# Altium PCB Chronos.PcbDoc (part 2 of 6)
Units mm, origin at the board's own origin, x right, y up, seen from the top; angles counter-clockwise.
Board outline 74.94 x 59.01 mm, 8 copper layers (TOP, L02_GND, L03_SIG, L04_PWR, L05_GND, L06_SIG, L07_GND, BOTTOM), stack 1.624 mm thick; 413 components, 238 nets, 1566 pads, 873 vias.
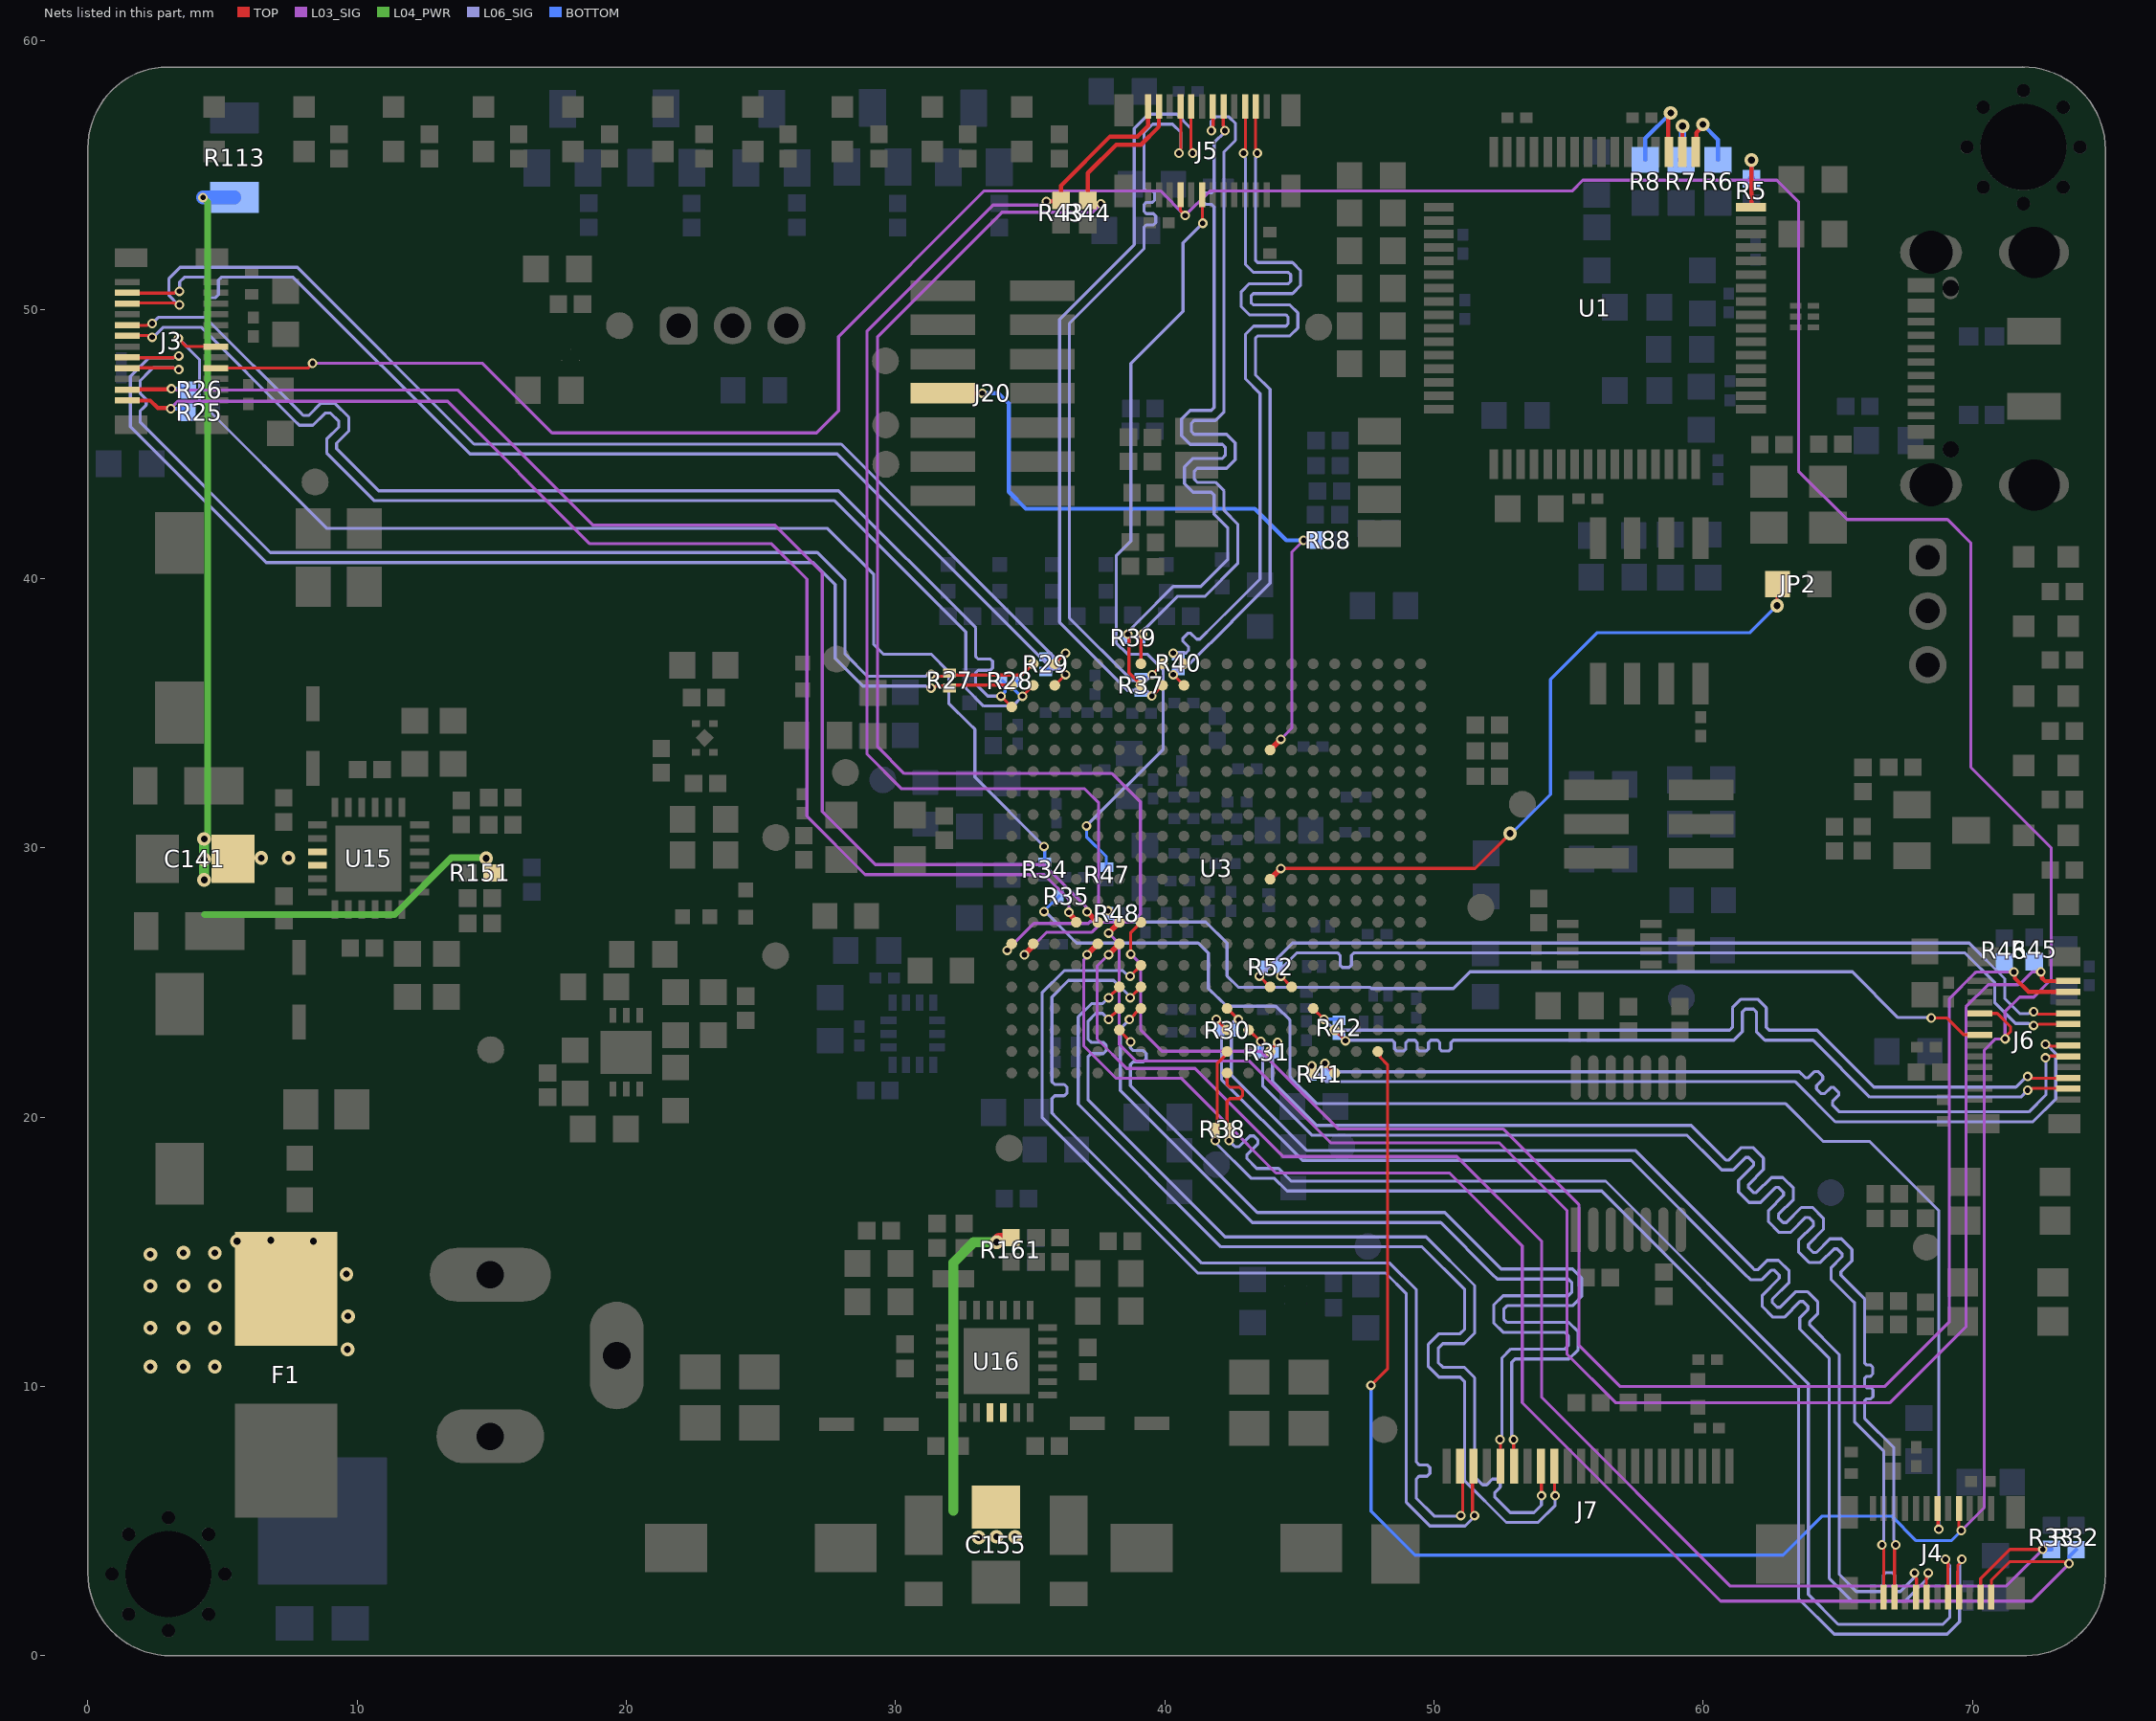
[diagram p8: the nets of this part, all layers, seen from the top]

## Part data
C1 C2 C3 C4 C7 C8 C9 C11 C12 C13 C15 C18 C19 C20 C24 C25 C27 C29 C31 C33 C35 C38 C40 C42 C45 C47 C49 C54 C55 C59 C60 C65 C66 C67 C68 C75 C92 C93 C95 C96 C99 C100 C102 C104 C106 C107 C171: library part 0u1_0402, "CAP CER 0.1UF 25V 10% X5R 0201", Manufacturer=Murata, Manufacturer Part Number=GRM033R61E104KE14J, Assy=-, Class=Discrete, Digikey P/N=399-3521-2-ND, PCB Footprint=C0201
  C1: Part Reference=C1
  C2: Part Reference=C2
  C3: Part Reference=C3
  C4: Part Reference=C4
  C7: Part Reference=C7
  C8: Part Reference=C8
  C9: Part Reference=C9
  C11: Part Reference=C11
  C12: Part Reference=C12
  C13: Part Reference=C13
  C15: Part Reference=C15
  C18 C38 C45 C102: Part Reference=C18
  C19 C40 C47 C104: Part Reference=C19
  C20: Part Reference=C20
  C24 C42 C49 C171: Part Reference=C24
  C25: Part Reference=C25
  C27: Part Reference=C27
  C29: Part Reference=C29
  C31: Part Reference=C31
  C33: Part Reference=C33
  C35: Part Reference=C35
  C54: Part Reference=C41
  C55: Part Reference=C42
  C59: Part Reference=C59
  C60: Part Reference=C60
  C65: Part Reference=C65
  C66: Part Reference=C66
  C67: Part Reference=C70
  C68: Part Reference=C71
  C75: Part Reference=C75
  C92 C99: Part Reference=C92
  C93 C100: Part Reference=C93
  C95: Part Reference=C95
  C96: Part Reference=C96
  C106: Part Reference=C106
  C107: Part Reference=C107
C5 C6 C10 C14: library part C, Current=CIMAX, MAX_TEMP=CTMAX, PSpiceTemplate="C^@REFDES %1 %2 ?TOLERANCE|C^@REFDES| @VALUE ?IC/IC=@IC/ ?TOLERANCE|\n.model C^@REFDES CAP C=1 DEV=@TOLERANCE%|", Voltage=CMAX, Assy=-, DIST=FLAT, KNEE=CBMAX, PCB Footprint=C0603, Populate=<Populate>, SLOPE=CSMAX
  C5: Part Reference=C5
  C6: Part Reference=C6
  C10: Part Reference=C10
  C14: Part Reference=C14
C16 C17: library part 0u1_0402, "CAP CER 18PF 25V 10% NP0 0402", Manufacturer=Kemet, Manufacturer Part Number=C0402C180K3GACTU, Assy=-, Class=Discrete, Digikey P/N=C0402C180K3GACTU-ND, PCB Footprint=C0402
  C16: Part Reference=C16
  C17: Part Reference=C17
C21 C22 C23 C37 C39 C41 C44 C46 C48 C52 C56 C57 C58 C64 C74 C91 C94 C98 C101 C103 C105 C108: library part 10uF_0603, "CAP CECAP CER 10UF 10V X5R 20% 0603", Manufacturer="Taiyo Yuden", Manufacturer Part Number=LMK107BJ106MALTD, Assy=-, Class=Discrete, Digikey P/N=587-2562-1-ND, PCB Footprint=C0603
  C21 C37 C44 C101: Part Reference=C21
  C22 C39 C46 C103: Part Reference=C22
  C23 C41 C48 C105: Part Reference=C23
  C52: Part Reference=C39
  C56: Part Reference=C68
  C57: Part Reference=C69
  C58: Part Reference=C58
  C64: Part Reference=C64
  C74: Part Reference=C74
  C91 C98: Part Reference=C91
  C94: Part Reference=C94
  C108: Part Reference=C108
C26 C28 C30 C32 C34 C36: library part 10uF_0603, "CAP CER 10UF 10V X5R 0402", Manufacturer=Samsung, Manufacturer Part Number=CL05A106MP8NUB8, Assy=-, Class=Discrete, Digikey P/N=587-2562-1-ND, PCB Footprint=C0402
  C26: Part Reference=C26
  C28: Part Reference=C28
  C30: Part Reference=C30
  C32: Part Reference=C32
  C34: Part Reference=C34
  C36: Part Reference=C36
C53: library part 0u1_0402, "CAP CECAP CER 10UF 10V X5R 20% 0603", Manufacturer="Taiyo Yuden", Manufacturer Part Number=LMK107BJ106MALTD, Assy=-, Class=Discrete, Digikey P/N=399-3521-2-ND, Part Reference=C40, PCB Footprint=C0603
C63 C76 C77: library part CAP_1, Assy=-, PCB Footprint=RLP-130-A
  C63: Part Reference=C63
  C76: Part Reference=C76
  C77: Part Reference=C77
C69 C71 C109 C110 C111 C112 C135 C136 C137 C138 C139 C140: library part "CAP NP", "CAP CER 10UF 10V 20% X6S 0603", Manufacturer=Samsung, Manufacturer Part Number=CL10X106MP8NRNC, Assy=-, Man. Part #=CL10X106MP8NRNC, MFG=Samsung, MFG P/N=CL10X106MP8NRNC, PCB Footprint=C0603
  C69 C71 C140: Part Reference=C140
  C109: Part Reference=C109
  C110: Part Reference=C110
  C111: Part Reference=C111
  C112: Part Reference=C112
  C135: Part Reference=C135
  C136: Part Reference=C136
  C137: Part Reference=C137
  C138: Part Reference=C138
  C139: Part Reference=C139
C70 C72 C118 C119 C120 C130 C131 C132: library part CAP_SMT_0805, "CAP CER 0.1UF 25V 10% X5R 0201", Manufacturer=Murata, Manufacturer Part Number=GRM033R61E104KE14J, Assy=-, PCB Footprint=C0201
  C70 C72 C120: Part Reference=C120
  C118: Part Reference=C118
  C119: Part Reference=C119
  C130: Part Reference=C130
  C131: Part Reference=C131
  C132: Part Reference=C132
C73 C97 C113 C114 C115 C116 C117 C124 C126 C127 C128 C129: library part CAP_1, "CAP CER 0.1UF 25V 10% X5R 0201", Manufacturer=Murata, Manufacturer Part Number=GRM033R61E104KE14J, Assy=-, PCB Footprint=C0201
  C73 C97 C113: Part Reference=C113
  C114: Part Reference=C114
  C115: Part Reference=C115
  C116: Part Reference=C116
  C117: Part Reference=C117
  C124: Part Reference=C124
  C126: Part Reference=C126
  C127: Part Reference=C127
  C128: Part Reference=C128
  C129: Part Reference=C129
C78: library part 0u1_0402, "CAP CER 0.1UF 25V 10% X5R 0402", Manufacturer=Murata, Manufacturer Part Number=GRM033R61E104KE14J, Assy=-, Class=Discrete, Digikey P/N=399-3521-2-ND, Part Reference=C78, PCB Footprint=C0201
C79 C80 C81 C121 C122 C123 C125 C133 C134: library part "CAP NP_Dup1", COMPFIXED=NO, COMPGROUP=0, COMPHEIGHT=0.000, COMPKEY=NO, COMPLOC=[1820.000,2015.000], COMPLOCKED=NO, COMPROT=270, COMPSIDE=TOP, DECOUPLER=NO, FPLIST=SM/C_0402, MEMORY=NO
  C79: Assy=DNI, Part Reference=C79, PCB Footprint=RLP-132, Populate=DNI
  C80: Assy=DNI, Part Reference=C80, PCB Footprint=RLP-132, Populate=DNI
  C81: Assy=DNI, Part Reference=C81, PCB Footprint=RLP-132, Populate=DNI
  C121: Assy=-, Part Reference=C121, PCB Footprint=C0603
  C122: Assy=-, Part Reference=C122, PCB Footprint=C0603
  C123: Assy=-, Part Reference=C123, PCB Footprint=C0603
  C125: Assy=-, Part Reference=C125, PCB Footprint=C0603
  C133: Assy=-, Part Reference=C133, PCB Footprint=C0603
  C134: Assy=-, Part Reference=C134, PCB Footprint=C0603
C141 C142 C143 C144 C145 C146 C147 C148 C149 C155 C156 C157 C158 C159 C160 C161 C162 C163 C164 C167: library part CAP-NP
  C141: Assy=-, Part Reference=C141, PCB Footprint=RLP-134
  C142: Assy=-, COMPFIXED=16V, Part Reference=C142, PCB Footprint=RLP-130-A
  C143: Assy=-, COMPFIXED=16V, Part Reference=C143, PCB Footprint=RLP-130-A
  C144: Assy=-, Part Reference=C144, PCB Footprint=RLP-130-A
  C145: Assy=-, Part Reference=C145, PCB Footprint=RLP-130-A
  C146: Assy=-, Part Reference=C146, PCB Footprint=RLP-130-A
  C147: Assy=-, Part Reference=C147, PCB Footprint=RLP-130-A
  C148: Assy=-, Part Reference=C148, PCB Footprint=RLP-130-A
  C149: Assy=-, Part Reference=C149, PCB Footprint=RLP-130-A
  C155: Assy=-, Part Reference=C155, PCB Footprint=RLP-134
  C156: Assy=-, COMPFIXED=16V, Part Reference=C156, PCB Footprint=RLP-130-A
  C157: Assy=-, COMPFIXED=16V, Part Reference=C157, PCB Footprint=RLP-130-A
  C158: Assy=-, Part Reference=C158, PCB Footprint=RLP-130-A
  C159: Assy=-, Part Reference=C159, PCB Footprint=RLP-130-A
  C160: Assy=-, Part Reference=C160, PCB Footprint=RLP-130-A
  C161: Assy=DNI, Part Reference=C161, PCB Footprint=RLP-130-A, Populate=DNI
  C162: Assy=DNI, Part Reference=C162, PCB Footprint=RLP-130-A, Populate=DNI
  C163: Assy=-, Part Reference=C163, PCB Footprint=RLP-130-A
  C164: Assy=-, Part Reference=C164, PCB Footprint=RLP-130-A
  C167: Assy=-, Part Reference=C167, PCB Footprint=RLP-130-A
C150 C151 C152 C153 C154 C165 C166 C168 C169 C170: library part CAP-NP, "CAP CER 22UF 10V X5R 0805", Manufacturer=Samsung, Manufacturer Part Number=CL21A226KPCLRNC, Assy=-, PCB Footprint=RLP-133
  C150: Part Reference=C150
  C151: Part Reference=C151
  C152: Part Reference=C152
  C153: Part Reference=C153
  C154: Part Reference=C154
  C165: Part Reference=C165
  C166: Part Reference=C166
  C168: Part Reference=C168
  C169: Part Reference=C169
  C170: Part Reference=C170
D1 D3 D4 D5 D6 D18 D19 D20 D21 D22 D23 D24 D25 D26 D27: library part LED-SMT1206_GREEN_1, Assy=-, PCB Footprint=APT1608
  D1: Part Reference=D1
  D3: Part Reference=D3
  D4: Part Reference=D4
  D5: Part Reference=D5
  D6: Part Reference=D6
  D18: Part Reference=D18
  D19: Part Reference=D19
  D20: Part Reference=D20
  D21: Part Reference=D21
  D22: Part Reference=D22
  D23: Part Reference=D23
  D24: Part Reference=D24
  D25: Part Reference=D25
  D26: Part Reference=D26
  D27: Part Reference=D27
D2: library part ESDR0502, "ESD Protection - SLP2510P8 package 8-PIN", ALS LIB=L0000, Assy=-, Class=IC, MFG=Semtech, MFG P/N=RClamp0524P, Part Reference=D2, PCB Footprint=UDFN6_040, Vendor=Digikey, Vendor P/N=RCLAMP0524PTR-ND
D17: library part LED-SMT1206_RED_0, Assy=-, Part Reference=D17, PCB Footprint=APT1608
D28: library part "DIODE SCHOTTKY21", Assy=-, Part Reference=D28, PCB Footprint=V12P10
D29 D30 D33 D34: library part DIODE_0, Assy=-, PCB Footprint=1N4448W
  D29: Part Reference=D29
  D30: Part Reference=D30
  D33: Part Reference=D33
  D34: Part Reference=D34
D31 D32 D35 D36: library part D-SCHOTTKY_0, Assy=-, PCB Footprint=DFLS220L
  D31: Part Reference=D31
  D32: Part Reference=D32
  D35: Part Reference=D35
  D36: Part Reference=D36
F1: library part SMTFUSE_0, "5A Fast-Blo SMT Socketed Fuse", Assy=-, Part Reference=F1, PCB Footprint=0154010
FB1 FB7 FB8: library part INDUCTOR_1, "FERRITE BEAD 120 OHM 0402 1LN", Manufacturer="TDK Corporation", Assy=-, Manufacturer Part Number=MPZ1005S121CT000, PCB Footprint=FB0402
  FB1: Part Reference=FB4
  FB7: Part Reference=FB7
  FB8: Part Reference=FB8
FB2 FB3 FB9 FB10: library part CMP-0686-00187-4, "Chip Ferrite Bead, 0402, 600Ω @ 100MHz, 0.52Ω, 25%, 300mA", Case Code (Imperial)=0402, Case Code (Metric)=1005, Current Rating=300mA, DC Resistance (DCR)=520mR, DC Resistance-Max=600mR, Frequency=100MHz, Max Operating Temperature=125°C, Min Operating Temperature=-55°C, Package Quantity=10000, Tolerance=25%, Case/Package=0402, Core Material=Ferrite, DC Current=300mA, Depth=0.55mm, Height=0.5mm, Impedance=600R, Lead Free="Lead Free", Length=1mm, Material=Steel, Max Current Rating=300mA, Max DC Current=300mA, Military Standard=Not, Number of Circuits=1, Number of Lines=1, Number of Pins=2, Packaging="Tape and Reel", Radiation Hardening=No, REACH SVHC="No SVHC", RoHS Compliant=Yes, Series=BLM15AG_SN, Shielding=Unshielded, Termination=SMD/SMT, Test Frequency=100MHz, Width=0.5mm
FB5 FB6: library part INDUCTOR_0, "FERRITE BEAD 120 OHM 0402 1LN", Manufacturer="TDK Corporation", Assy=-, Manufacturer Part Number=MPZ1005S121CT000, PCB Footprint=FB0402
  FB5: Part Reference=FB5
  FB6: Part Reference=FB6
IC1: "Integrated Circuit", Manufacturer_Name=TDK, Mouser Part Number=410-ICM-42688-P, Arrow Part Number=ICM-42688-P, Arrow Price/Stock=https://www.arrow.com/en/products/icm-42688-p/invensense?utm_currency=USD&region=nac, Datasheet Link=https://3cfeqx1hf82y3xcoull08ihx-wpengine.netdna-ssl.com/wp-content/uploads/2021/06/DS-000347-ICM-42688-P-v1.5.pdf, Manufacturer_Part_Number=ICM-42688-P, Mouser Price/Stock=https://www.mouser.co.uk/ProductDetail/TDK-InvenSense/ICM-42688-P?qs=OlC7AqGiEDk8QrNAV728zw%3D%3D
J1: library part CMP-1502-00936-4, "Conn, Pin Hdr, 6POS, 2ROW, 1.27MM Rohs Compliant: Yes"
J2: library part CMP-19038-000002-1, "CONN RCP USB2.0 TYP C 24P SMD RA"
J3 J4 J5 J6: "AXT524124 24 Position 0.4 mm Pitch Dual Row Board to Board Socket Narrow Pitch Connector", Ambient Temperature Range High=85°C, Contact Resistance=90mΩ, Current Rating=300mA, Insulation Resistance=1GΩ, Max Current Rating=5A, Max Voltage Rating (AC)=60V, Max Voltage Rating (DC)=6.06kV, Min Operating Temperature=-55°C, Connector Type=Socket, Contact Material="Gold, Nickel", Contact Plating=Gold, Depth=3mm, Gender=Receptacle, Height=1.17mm, Housing Material=Polymer, Lead Free="Lead Free", Length=7.3mm, Mated Stacking Heights=1mm, Max Operating Temperature=85°C, Mount="Surface Mount", NexarPartId=7879795, Number of Contacts=24, Number of Positions=24, Number of Rows=2, Orientation=Straight, Packaging="Cut Tape (CT)", Pitch=400µm, Radiation Hardening=No, RoHS=Compliant, Termination=Solder, Voltage Rating=60V
J7: "Connector", Manufacturer_Name=Hirose, Manufacturer_Part_Number=FH12-22S-0.5SH(1)(98), Mouser Part Number=798-FH1222S05SH198, Datasheet Link=https://www.hirose.com/en/product/document?clcode=CL0528-0014-1-98&productname=FH12-22S-0.5SH(1)(98)&series=FH12&documenttype=2DDrawing&lang=en&documentid=0001188303, Height=2.2mm, Mouser Price/Stock=https://www.mouser.co.uk/ProductDetail/Hirose-Connector/FH12-22S-0.5SH198?qs=tTj%252BmQ3KZwZO1A%252B5eseZow%3D%3D
J20: library part CMP-1502-00928-4, "Conn, Header, 14Pos, 2Row, 1.27Mm Rohs Compliant: Yes", Contact Resistance=20mΩ, Current Rating=1A, Operating Supply Voltage=100V, Gender=Male, Lead Pitch=1.27mm, Number of Pins=14, Orientation=Vertical, RoHS=Non-Compliant
J39: library part 22HP037A, "Male Power Jack 2.1mm", Assy=-, Part Reference=J39, PCB Footprint=pj_002a_3p
J44 P1: library part CMP-1502-00957-5, "THT Vertical Pin Header WR-PHD, Pitch 2.00 mm, Single Row, 3 pins", Contact Resistance=20mΩ, Current Rating=2A, Max Operating Temperature=105°C, Min Operating Temperature=-40°C, Operating Supply Voltage=200V, Contact Material=Gold, Gender=Male, Height=6.35mm, Lead Pitch=2mm, Number of Contacts=3, Number of Pins=3, Number of Rows=1, Orientation=Vertical, RoHS=Compliant, Voltage Rating=200V
JP1 JP2: library part JUMPER_0, Assy=-, PCB Footprint=Header_1x2
  JP1: Part Reference=JP1
  JP2: Part Reference=JP2
L1 L2 L3: library part FB0603, "FERRITE CHIP 600 OHM 500MA 0603", Manufacturer=Murata, Manufacturer Part Number=BLM18AG601SN1D, Assy=-, Class=Discrete, Digikey P/N=490-1014-1-ND, PCB Footprint=fb0603
  L1: Part Reference=L1
  L2: Part Reference=L2
  L3: Part Reference=L3
L4 L5 L6 L7 L8 L9: library part FB0603, "FERRITE BEAD 600 OHM 0402 1LN", Manufacturer=Murata, Manufacturer Part Number=BLM15AX601SN1D, Assy=-, Class=Discrete, Digikey P/N=490-1014-1-ND, PCB Footprint=FB0402
  L4: Part Reference=L4
  L5: Part Reference=L5
  L6: Part Reference=L6
  L7: Part Reference=L7
  L8: Part Reference=L8
  L9: Part Reference=L9
L14 L15 L16 L17: library part IND, Assy=-, COMPFIXED=SUMIDA, PCB Footprint=SPD62R
  L14: COMPGROUP=CDRH3D18, Part Reference=L14
  L15: COMPGROUP=CDRH3D18C, Part Reference=L15
  L16: COMPGROUP=CDRH3D18, Part Reference=L16
  L17: COMPGROUP=CDRH3D18C, Part Reference=L17
Q1 Q2 Q3 Q4 Q5 Q6: library part 2N2222, Assy=-, PCB Footprint=MMBT2222ALT-1
  Q1: Part Reference=Q1
  Q2: Part Reference=Q2
  Q3: Part Reference=Q3
  Q4: Part Reference=Q4
  Q5: Part Reference=Q5
  Q6: Part Reference=Q6
R1 R2 R3: library part 5k1_0402, "RES 4.70K OHM 1/10W 1% 0603 SMD", Manufacturer=Vishay, Manufacturer Part Number=CRCW06034K70FKEA, Assy=-, Class=Discrete, Digikey P/N=541-4.70KHTR-ND, PCB Footprint=R0603
  R1: Part Reference=R1
  R2: Part Reference=R2
  R3: Part Reference=R3
R4 R9: library part 5k1_0402, Manufacturer=Vishay, Manufacturer Part Number=CRCW06032K20FKEA, Assy=-, Class=Discrete, Digikey P/N=541-2.20KHTR-ND, PCB Footprint=R0603
  R4: Part Reference=R4
  R9: Part Reference=R9
R5: library part 0R_0603, "RES SMD 33 OHM 1% 1/10W 0402", Manufacturer=Panasonic, Manufacturer Part Number=ERJ-2RKF33R0X, Assy=-, Class=Discrete, Digikey P/N=311-0.0GRTR-ND, Part Reference=R5, PCB Footprint=R0402
R6 R7 R8 R20 R21 R22 R145 R146 R147 R149 R150: library part 0R_0603, "RES 0.0 OHM 1/10W JUMP 0603 SMD", Manufacturer=Yageo, Manufacturer Part Number=RC0603JR-070RL, Class=Discrete, Digikey P/N=311-0.0GRTR-ND, PCB Footprint=R0603
  R6: Assy=-, Part Reference=R6
  R7: Assy=-, Part Reference=R7
  R8: Assy=-, Part Reference=R8
  R20: Assy=-, Part Reference=R20
  R21: Assy=-, Part Reference=R21
  R22: Assy=-, Part Reference=R22
  R145: Assy=DNI, Part Reference=R145
  R146: Assy=DNI, Part Reference=R146
  R147: Assy=DNI, Part Reference=R147
  R149: Assy=DNI, Part Reference=R149
  R150: Assy=DNI, Part Reference=R150
R10 R11 R12 R57: library part RES_10K_1W16_0402_5P, "RES 10K OHM 1/10W 5% 0603", Manufacturer="Stackpole Electronics Inc", Manufacturer Part Number=RMCF0603JT10K0, MAX_TEMP=RTMAX, Assy=-, Digikey P/N=RMCF0603JT10K0TR-ND, DIST=FLAT, Length(mm)=1, MFG="Stackpole Electronics Inc", MFG P/N=RMCF0402JT10K0, PCB Footprint=R0603, TC1=0, TC2=0, Total Area(sq-mm)=0.5, Unit Price (USD)=0.02, Wattage=1/10W, Width(mm)=0.5
  R10 R57: Part Reference=R10
  R11: Part Reference=R11
  R12: Part Reference=R12
R13 R16: library part 10k_0402, "RES 12K OHM 1/10W 1% 0603 SMD", Manufacturer=Yageo, Manufacturer Part Number=RC0603FR-0712KL, Tolerance=1%, Assy=-, Class=Discrete, Digikey P/N=311-12.0KHRTR-ND, PCB Footprint=R0603
  R13: Part Reference=R13
  R16: Part Reference=R16
R14 R113: library part RES_0, Assy=-
  R14: Part Reference=R14, PCB Footprint=RLP-101
  R113: Part Reference=R113, PCB Footprint=RLP-103
R15 R17: library part 0R_0603, "Res 1/10W 0.0 Ohm 5% 0603", Manufacturer=Yageo, Manufacturer Part Number=RC0603JR-070RL, Assy=DNI, Class=Discrete, Digikey P/N=311-0.0GRTR-ND, PCB Footprint=R0603
  R15: Part Reference=R15
  R17: Part Reference=R17
R18 R19 R53 R54: library part RESISTOR, Assy=-, PCB Footprint=RLP-101, Populate=<Populate>
  R18 R53: Part Reference=R18
  R19 R54: Part Reference=R19
R23 R75: library part RES_100K_1W16_0402_5P, "RES 100K OHM 1/10W 1% 0402 SMD", Manufacturer=Panasonic, Manufacturer Part Number=ERJ-2RKF1003X, MAX_TEMP=RTMAX, Assy=-, DIST=FLAT, Length(mm)=1, MFG=Panasonic, MFG P/N=ERJ-2RKF1003X, PART_NUMBER=ERJ-2RKF1003X, PCB Footprint=R0402, TC1=0, TC2=0, Total Area(sq-mm)=0.5, Unit Price (USD)=0.02, Wattage=1/16W, Width(mm)=0.5
  R23: Part Reference=R23
  R75: Part Reference=R75
R24: library part 0R_0603, "RES SMD 22 OHM 1% 1/10W 0402", Manufacturer=Panasonic, Manufacturer Part Number=ERJ-2RKF22R0X, Assy=-, Class=Discrete, Digikey P/N=311-0.0GRTR-ND, MFG=Panasonic, MFG P/N=ERJ-2RKF22R0X, Part Reference=R24, PCB Footprint=R0402
R25 R26 R32 R33 R36 R43 R44 R45 R46 R51: library part 5k1_0402, "RES SMD 2.2K OHM 1% 1/10W 0402", Manufacturer=Panasonic, Manufacturer Part Number=ERJ-2RKF2201X, Assy=-, BOM NOTE=-, Class=Discrete, Digikey P/N=311-5.10KLRTR-ND, PCB Footprint=R0402
  R25 R32 R43 R45: Part Reference=R25
  R26 R33 R36 R44 R46 R51: Part Reference=R26
R27 R28 R29 R30 R31 R37 R38 R39 R40 R41 R42 R52: library part RES_100K_1W16_0402_5P, "RES SMD 100 OHM 1% 1/20W 0201", Manufacturer=Yageo, Manufacturer Part Number=RC0201FR-07100RL, MAX_TEMP=RTMAX, Assy=DNI, DIST=FLAT, Length(mm)=1, MFG=Yageo, MFG P/N=RC0201FR-07100RL, PCB Footprint=R0201, TC1=0, TC2=0, Total Area(sq-mm)=0.5, Unit Price (USD)=0.02, Wattage=1/16W, Width(mm)=0.5
  R27 R37 R38 R52: Part Reference=R27
  R28 R39: Part Reference=R28
  R29 R40: Part Reference=R29
  R30 R41: Part Reference=R30
  R31 R42: Part Reference=R31
R34 R35 R47 R48: library part 0R_0603, "RES SMD 33 OHM 1% 1/10W", Manufacturer=Panasonic, Manufacturer Part Number=ERJ-2RKF33R0X, Assy=-, Class=Discrete, Digikey P/N=311-0.0GRTR-ND, Part Reference=R5, PCB Footprint=R0402
R55 R56: library part CMP-2002-05251-2, "Thick Film Chip Resistors 0402 5.1kΩ 0.0625W 1% 100ppm/°C", Case Code (Metric)=1005, Case Code (Imperial)=0402, Max Operating Temperature=125°C, Max Power Dissipation=63mW, Min Operating Temperature=-55°C, Package Quantity=10000, Power Rating=62.5mW, Resistance=5.1kR, Temperature Coefficient=100ppm/°C, Tolerance=1%, Voltage Rating=50V, Case/Package=0402, Composition="Thick Film", Contact Plating=Tin, Depth=0.5mm, Height=0.016inch, Length=1mm, Military Standard=Not, Mount="Surface Mount", Number of Terminations=2, Packaging="Tape and Reel", Radiation Hardening=No, Termination=SMD/SMT, Thickness=356um, Width=0.02inch
R58 R59 R60 R61 R62 R63: library part RES_100K_1W16_0402_5P, "RES SMD 33 OHM 1% 1/20W 0201", Manufacturer=Yageo, MAX_TEMP=RTMAX, Assy=DNI, DIST=FLAT, Length(mm)=1, MFG=Yageo, Part Reference=R27, PCB Footprint=R0201, TC1=0, TC2=0, Total Area(sq-mm)=0.5, Unit Price (USD)=0.02, Wattage=1/16W, Width(mm)=0.5
R64 R65 R66 R67 R68 R70 R88 R89 R90 R91 R92: library part R_Dup2, "RES SMD 0.0OHM JUMPER 1/10W 0402", Manufacturer=Panasonic, Manufacturer Part Number=ERJ-2GE0R00X, MAX_TEMP=RTMAX, POWER=RMAX, PSpiceTemplate="R^@REFDES %1 %2 ?TOLERANCE|R^@REFDES| @VALUE  ?TOLERANCE|\n.model R^@REFDES RES R=1 DEV=@TOLERANCE%|", Voltage=RVMAX, Assy=-, COMPFIXED=NO, COMPGROUP=0, COMPHEIGHT=0.000, COMPKEY=NO, COMPLOC=[3325.000,1400.000], COMPLOCKED=NO, COMPROT=180, COMPSIDE=TOP, DECOUPLER=NO, DIST=FLAT, FPLIST=AX/RC05, MEMORY=NO, PCB Footprint=R0402, SLOPE=RSMAX
  R64 R65 R66 R67 R68 R70 R88: Part Reference=R88
  R89: Part Reference=R89
  R90: Part Reference=R90
  R91: Part Reference=R91
  R92: Part Reference=R92
R69 R83: library part RES_0, "RES SMD 10K OHM 1% 1/16W 0402", Manufacturer=Yageo, Manufacturer Part Number=RC0402FR-0710KL, Assy=-, MFG=Yageo, MFG P/N=RC0402FR-0710KL, PCB Footprint=R0402
  R69: Part Reference=R69
  R83: Part Reference=R83
R72 R80: library part 0R_0603, "RES SMD 100 OHM 1% 1/16W 0402", Manufacturer=Yageo, Manufacturer Part Number=RC0402FR-07100RL, Assy=-, Class=Discrete, Digikey P/N=311-0.0GRTR-ND, MFG=Yageo, PCB Footprint=R0402
  R72: Part Reference=R72
  R80: MFG P/N=RC0402FR-07100RL, Part Reference=R80
R73 R74 R78: library part R_Dup3, "RES SMD 33 OHM 1% 1/10W 0402", Manufacturer=Panasonic, Manufacturer Part Number=ERJ-2RKF33R0X, Assy=-, PCB Footprint=R0402
  R73: Part Reference=R73
  R74: Part Reference=R74
  R78: Part Reference=R78
R76 R82: library part R_Dup3, "RES SMD 10K OHM 1% 1/16W 0402", Manufacturer=Yageo, Manufacturer Part Number=RC0402FR-0710KL, Assy=-, MFG=Yageo, MFG P/N=RC0402FR-0710KL, PCB Footprint=R0402
  R76: Part Reference=R76
  R82: Part Reference=R82
R77: library part R_Dup3, "RES SMD 100 OHM 1% 1/16W 0402", Manufacturer=Yageo, Manufacturer Part Number=RC0402FR-07100RL, Assy=-, MFG=Yageo, MFG P/N=RC0402FR-07100RL, Part Reference=R77, PCB Footprint=R0402
R79 R81 R115 R117 R118 R119 R125 R126: library part RES_0, "RES SMD 1K OHM 1% 1/10W 0402", Manufacturer=Panasonic, Manufacturer Part Number=ERJ-2RKF1001X, Assy=-, PCB Footprint=R0402
  R79: Part Reference=R79
  R81: Part Reference=R81
  R115: Part Reference=R115
  R117: Part Reference=R117
  R118: Part Reference=R118
  R119: Part Reference=R119
  R125: Part Reference=R125
  R126: Part Reference=R126
R84 R85 R87 R140 R142: library part R_Dup2, "RES SMD 4.7K OHM 5% 1/10W 0402", Manufacturer=Panasonic, Manufacturer Part Number=ERJ-2GEJ472X, MAX_TEMP=RTMAX, POWER=RMAX, PSpiceTemplate="R^@REFDES %1 %2 ?TOLERANCE|R^@REFDES| @VALUE  ?TOLERANCE|\n.model R^@REFDES RES R=1 DEV=@TOLERANCE%|", Voltage=RVMAX, Assy=-, COMPFIXED=NO, COMPGROUP=0, COMPHEIGHT=0.000, COMPKEY=NO, COMPLOC=[970.000,1160.000], COMPLOCKED=NO, COMPROT=180, COMPSIDE=TOP, DECOUPLER=NO, DIST=FLAT, FPLIST=AX/RC05,SM/R_0603, MEMORY=NO, MFG=Panasonic, MFG P/N=ERJ-2GEJ472X, PCB Footprint=R0402, SLOPE=RSMAX
  R84: Part Reference=R84
  R85: Part Reference=R85
  R87: Part Reference=R87
  R140: Part Reference=R140
  R142: Part Reference=R142
R86: library part R_Dup2, "RES SMD 1K OHM 1% 1/10W 0402", Manufacturer=Panasonic, Manufacturer Part Number=ERJ-2RKF1001X, MAX_TEMP=RTMAX, POWER=RMAX, PSpiceTemplate="R^@REFDES %1 %2 ?TOLERANCE|R^@REFDES| @VALUE  ?TOLERANCE|\n.model R^@REFDES RES R=1 DEV=@TOLERANCE%|", Voltage=RVMAX, Assy=DNI, COMPFIXED=NO, COMPGROUP=0, COMPHEIGHT=0.000, COMPKEY=NO, COMPLOC=[970.000,1160.000], COMPLOCKED=NO, COMPROT=180, COMPSIDE=TOP, DECOUPLER=NO, DIST=FLAT, FPLIST=AX/RC05,SM/R_0603, MEMORY=NO, Part Reference=R86, PCB Footprint=R0402, SLOPE=RSMAX
R114: library part RES_0, "RES SMD 2.2K OHM 1% 1/10W 0402", Manufacturer=Panasonic, Manufacturer Part Number=ERJ-2RKF2201X, Assy=-, Part Reference=R114, PCB Footprint=R0402
R116 R120 R141 R144: library part RES_1K_1W16_0402_5P, "RES SMD 1K OHM 1% 1/10W 0402", Manufacturer=Panasonic, Manufacturer Part Number=ERJ-2RKF1001X, MAX_TEMP=RTMAX, Assy=-, DIST=FLAT, Length(mm)=1, MFG="Stackpole Electronics Inc", MFG P/N=RMCF0402JT1K00, PCB Footprint=R0402, TC1=0, TC2=0, Total Area(sq-mm)=0.5, Unit Price (USD)=0.02, Wattage=1/16W, Width(mm)=0.5
  R116: Part Reference=R116, Reference=R116
  R120: Part Reference=R120, Reference=R120
  R141: Part Reference=R141, Reference=R141
  R144: Part Reference=R144, Reference=R144
R121: library part RES_0, "RES SMD 750 OHM 5% 1/10W 0402", Manufacturer=Panasonic, Manufacturer Part Number=ERJ-2GEJ751X, Assy=-, Part Reference=R121, PCB Footprint=R0402
R122 R123 R124 R132 R133: library part RES_0, "RES SMD 4.7K OHM 5% 1/10W 0402", Manufacturer=Panasonic, Manufacturer Part Number=ERJ-2GEJ472X, Assy=-, MFG=Panasonic, MFG P/N=ERJ-2GEJ472X, PCB Footprint=R0402
  R122: Part Reference=R122
  R123: Part Reference=R123
  R124: Part Reference=R124
  R132: Part Reference=R132
  R133: Part Reference=R133
R127 R128 R129 R130 R131 R134 R135 R136 R137 R138 R153: library part R_Dup2, MAX_TEMP=RTMAX, POWER=RMAX, PSpiceTemplate="R^@REFDES %1 %2 ?TOLERANCE|R^@REFDES| @VALUE  ?TOLERANCE|\n.model R^@REFDES RES R=1 DEV=@TOLERANCE%|", Voltage=RVMAX, Assy=-, COMPFIXED=NO, COMPGROUP=0, COMPHEIGHT=0.000, COMPKEY=NO, COMPLOC=[970.000,1160.000], COMPLOCKED=NO, COMPROT=180, COMPSIDE=TOP, DECOUPLER=NO, DIST=FLAT, FPLIST=AX/RC05,SM/R_0603, MEMORY=NO, PCB Footprint=0603, SLOPE=RSMAX, Tollerance=1%
  R127: Part Reference=R127
  R128: Part Reference=R128
  R129: Part Reference=R129
  R130: Part Reference=R130
  R131: Part Reference=R131
  R134: Part Reference=R134
  R135: Part Reference=R135
  R136: Part Reference=R136
  R137: Part Reference=R137
  R138: Part Reference=R138
  R153: Part Reference=R153
R143 R148 R151 R154 R155 R156 R157 R158 R159 R160 R161 R164 R165 R166 R167 R168 R169 R170: library part R_Dup1, Assy=-
  R143: COMPFIXED=1%, Part Reference=R143, PCB Footprint=RLP-101
  R148: COMPFIXED=1%, Part Reference=R148, PCB Footprint=RLP-101
  R151: Part Reference=R151, PCB Footprint=RLP-100
  R154: COMPFIXED=1%, Part Reference=R154, PCB Footprint=RLP-101
  R155: COMPFIXED=1%, Part Reference=R155, PCB Footprint=RLP-101
  R156: COMPFIXED=1%, Part Reference=R156, PCB Footprint=RLP-101
  R157: COMPFIXED=1%, Part Reference=R157, PCB Footprint=RLP-100
  R158: COMPFIXED=1%, COMPGROUP="Freq = 1.0 MHz", Part Reference=R158, PCB Footprint=RLP-100
  R159: COMPFIXED=1%, Part Reference=R159, PCB Footprint=RLP-100
  R160: COMPFIXED=1%, Part Reference=R160, PCB Footprint=RLP-101
  R161: Part Reference=R161, PCB Footprint=RLP-100
  R164: COMPFIXED=1%, Part Reference=R164, PCB Footprint=RLP-101
  R165: COMPFIXED=1%, Part Reference=R165, PCB Footprint=RLP-101
  R166: COMPFIXED=1%, Part Reference=R166, PCB Footprint=RLP-100
  R167: COMPFIXED=1%, COMPGROUP="Freq = 625 KHz", Part Reference=R167, PCB Footprint=RLP-100
  R168: COMPFIXED=1%, Part Reference=R168, PCB Footprint=RLP-100
  R169: COMPFIXED=1%, Part Reference=R169, PCB Footprint=RLP-101
  R170: COMPFIXED=1%, Part Reference=R170, PCB Footprint=RLP-101
R172: library part 5k1_0402, "RES SMD 10K OHM 1% 1/10W 0603", Manufacturer=Yageo, Manufacturer Part Number=RC0603FR-0710KL, Assy=-, Class=Discrete, Digikey P/N=541-4.70KHTR-ND, Part Reference=R172, PCB Footprint=R0603
R173: library part 0R_0603, "RES SMD 1K OHM 1% 1/10W 0603", Manufacturer=Yageo, Manufacturer Part Number=RC0603FR-071KL, Assy=DNI, Class=Discrete, Digikey P/N=311-0.0GRTR-ND, Part Reference=R173, PCB Footprint=R0603
R174 R175 R176 R177: library part RES_0, "RES SMD 2K OHM 5% 1/10W 0402", Manufacturer=Panasonic, Manufacturer Part Number=ERJ-2GEJ202X, Assy=-, MFG=Panasonic, MFG P/N=ERJ-2GEJ202X, PCB Footprint=R0402
  R174: Part Reference=R174
  R175: Part Reference=R175
  R176: Part Reference=R176
  R177: Part Reference=R177
SW4 SW5: library part "SW PUSHBUTTON-SPST/SM", "SWITCH TACTILE SPST-NO 0.05A 12V", Manufacturer=Wurth, Manufacturer Part Number=434153017835, Assy=-, Man. Part #=434153017835, MFG=Wurth, MFG P/N=434153017835, PCB Footprint=4psmd_switch
  SW4: Part Reference=SW4
  SW5: Part Reference=SW5
TP1 TP2 TP_V1P0_LDO TP_V1P2 TP_V1P8 TP_V1P8_LDO TP_V2P8 TP_V3P3 TP_V5P0 TP_VCC_CORE_V1P0 TP_VCCIO0 TP_VCCIO1 TP_VCCIO2 TP_VCCIO3 TP_VCCIO4 TP_VCCIO5 TP_VCCIO6 TP_VCCIO7: "Square test point, 40mil inner diameter, 63mil outer diameter", Assy=DNI, Class=IO
  TP1: Part Reference=TP1, PCB Footprint=TP
  TP2: Part Reference=TP2, PCB Footprint=TP
  TP_V1P0_LDO: Part Reference=TP_V1P0_LDO, PCB Footprint=tp_s_40_63
  TP_V1P2: Part Reference=TP_V1P2, PCB Footprint=tp_s_40_63
  TP_V1P8: Part Reference=TP_V1P8, PCB Footprint=tp_s_40_63
  TP_V1P8_LDO: Part Reference=TP_V1P8_LDO, PCB Footprint=tp_s_40_63
  TP_V2P8: Part Reference=TP_V2P8, PCB Footprint=tp_s_40_63
  TP_V3P3: Part Reference=TP_V3P3, PCB Footprint=tp_s_40_63
  TP_V5P0: Part Reference=TP_V5P0, PCB Footprint=tp_s_40_63
  TP_VCC_CORE_V1P0: Part Reference=TP_VCC_CORE_V1P0, PCB Footprint=tp_s_40_63
  TP_VCCIO0: Part Reference=TP_VCCIO0, PCB Footprint=tp_s_40_63
  TP_VCCIO1: Part Reference=TP_VCCIO1, PCB Footprint=tp_s_40_63
  TP_VCCIO2: Part Reference=TP_VCCIO2, PCB Footprint=tp_s_40_63
  TP_VCCIO3: Part Reference=TP_VCCIO3, PCB Footprint=tp_s_40_63
  TP_VCCIO4: Part Reference=TP_VCCIO4, PCB Footprint=tp_s_40_63
  TP_VCCIO5: Part Reference=TP_VCCIO5, PCB Footprint=tp_s_40_63
  TP_VCCIO6: Part Reference=TP_VCCIO6, PCB Footprint=tp_s_40_63
  TP_VCCIO7: Part Reference=TP_VCCIO7, PCB Footprint=tp_s_40_63
TP7 TP9 TP10 TP12: library part "T POINT R", Assy=-, PCB Footprint=TP50
  TP7: Part Reference=TP7
  TP9: Part Reference=TP9
  TP10: Part Reference=TP10
  TP12: Part Reference=TP12
U1: "IC USB HS DUAL UART/FIFO 64-LQFP", Manufacturer=FTDI, Assy="Customer Supplied", Class=IC, Digikey P/N=768-1024-1-ND, Manufacturer Part Number=FT2232HL, Part Reference=U1, PCB Footprint=tqfp64_0p5_12p2x12p2_h1p6
U2: library part 93LC56_SO8_0, "IC EEPROM 2KBIT 3MHZ 8SOIC", Manufacturer=Microchip, Assy=-, Class=IC, Digikey P/N=93LC56C-I/SN-ND, Manufacturer Part Number=93LC56C-I/SN, Part Reference=U2, PCB Footprint=so8_50_244
U3: Color=Default, Power Pins Visible=False, Assy=-, Graphic=LIFCL-40-BG400A.Normal, Implementation Type=<none>, Location X-Coordinate=0, Location Y-Coordinate=0, Name=I17266603, Part Reference=U3, PCB Footprint=LIFCL-40-BG400, Primitive=DEFAULT, Source Library=C:\USERS\SLIU1\DOCUMENTS\PCB_DESIGN\JEDI_EVAL_BOARD\SCHEMATIC\LIFCL40.OLB, Source Package=LIFCL-40-BG400, Source Part=LIFCL-40-BG400A.Normal, SPLIT_INST=TRUE, SWAP_INFO=(S1+S2+S3+S4+S5+S6+S7+S8+S9+S10+S11+S12+S13+S14+S15)
U5: library part CMP-0440-00179-4, "IC BUF NON-INVERT 3.6V 14TSSOP", Case/Package=TSSOP, High Level Output Current=-24mA, Low Level Output Current=24mA, Max Operating Temperature=125°C, Max Power Dissipation=500mW, Max Supply Voltage=3.6V, Min Operating Temperature=-40°C, Min Supply Voltage=1.65V, Package Quantity=1, Quiescent Current=1uA, Contact Plating=Gold, Height=1.15mm, Lead Free="Lead Free", Length=5mm, Logic Function=Buffer, Mount="Surface Mount", Number of Bits=4, Number of Bits per Element=1, Number of Channels=4, Number of Circuits=4, Number of Elements=4, Number of Gates=4, Number of Input Lines=4, Number of Inputs=4, Number of Output Lines=3, Number Of Outputs=4, Number of Pins=14, Packaging="Tape and Reel", Polarity=Non-Inverting, Propagation Delay=4.6ns, Radiation Hardening=No, REACH SVHC="No SVHC", Termination=SMD/SMT, Turn-On Delay Time=5.3ns, Width=4.4mm
U6: library part N25QxxxA13xF8_0, "IC FLASH 128MBIT 104MHZ 8SOP", Manufacturer=Macronix, Assy=-, Manufacturer Part Number=MX25L12833FM2I-10G, Part Reference=U6, PCB Footprint=SO8_MX25L12833FM2I10G, Populate=DI
U9: library part CMP-0859-00680-4, "IC BUFFER NON-INVERT 5.5V US8", Ambient Temperature Range High=+125°C, Ambient Temperature Range Low=-40°C, Manufacturer="Texas Instruments", Max Junction Temp=+150°C, Max Supply Voltage=5.5V, Min Supply Voltage=1.65V, Package=DCU0008A, Temperature="-40°C to +125°C", Automotive=No, Category=IC, ComponentLink2Description=Datasheet, ComponentLink2URL=http://www.ti.com/lit/ds/symlink/sn74lvc2g125.pdf, Device Class L1="Integrated Circuits (ICs)", Device Class L2="Logic ICs", Device Class L3=Buffers, Digikey Description="IC BUFFER NON-INVERT 5.5V US8", Height=0.9mm, Ipc Land Pattern Name=SOP50P310X75-8, Lead Free=Yes, Logic Function Desc=Non-Inverting, Manufacturer Part Number=SN74LVC2G125DCUR, Mouser Description="Buffers & Line Drivers Tri-State Dual Bus", Number of Circuits=2, Number of Inputs=1, Number Of Outputs=1, Octopart=https://octopart.com/sn74lvc2g125dcur-texas+instruments-464564, Propagation Delay=4.2ns, RoHS=TRUE, Standoff Height=0mm, Temperature Range High=+125°C, Temperature Range Low=-40°C
U15 U16: library part LT3508EUF-QFN24UF-4X4_0, Assy=-, DES="IC, LINEAR TECH, LTC1563", PCB Footprint=LT3508EUF, UCOST=$0.00
  U15: Part Reference=U15
  U16: Part Reference=U16
X1: library part crystal-3p2x2p5, "CRYSTAL 12MHZ 18PF SMD", Manufacturer=TXC, Manufacturer Part Number=7M-12.000MAAJ-T, Assy=-, Class=IC, Digikey P/N=887-1121-2-ND, Part Reference=X1, PCB Footprint=xtal_4p_7m
X2: library part OSC_25MHz_10PPM, "Standard Clock Oscillators 27.000M 1.8V 30ppm", Manufacturer=ABRACON, Assy=-, Length(mm=5.1, Manufacturer Part Number=ASE3-27.000MHz-K-T, MFG="Abracon Corporation", MFG P/N=ASFLMB-25.000MHZ-LY-T, Part Reference=X2, PCB Footprint=27MHZ, Total Area(sq-mm)=16.83, Unit Price (USD)=1.96, Width(mm)=3.3
U11: Assy=-, Part Reference=U11, PCB Footprint=4XDFN_NCP110
U12: Assy=-, Part Reference=U12, PCB Footprint=4XDFN_NCP110
U13: Assy=-, Part Reference=U13, PCB Footprint=6HVSOF_BD00IC0WHFV
U14: Assy=-, Part Reference=U14, PCB Footprint=4X2SON

## Free pads (board coordinates)
  round 0.5 hole 0.5: 1(0.893,3.03) 1(1.508,1.545) 1(1.508,4.515) 1(2.993,0.93) 1(2.993,5.13) 1(4.478,1.545) 1(4.478,4.515) 1(5.093,3.03) 1(69.797,56.03) 1(70.412,54.545) 1(70.412,57.515) 1(71.897,53.93) 1(71.897,58.13) 1(73.382,54.545) 1(73.382,57.515) 1(73.997,56.03)
  round 3.2 hole 3.2: 1(2.993,3.03) 1(71.897,56.03)

## Via types
v1: diameter 0.356, hole 0.203, TOP to BOTTOM, tented both sides, 492 vias
v2: diameter 0.508, hole 0.254, TOP to BOTTOM, tented both sides, 380 vias
v3: diameter 0.356, hole 0.203, TOP to BOTTOM, 1 vias

## Nets (pads, with @x,y where several pads share a name; then routed paths per layer and width w, separated by ;. In a path a pad name is that pad's centre, name@x,y a point inside that pad or via, vN(x,y) a via of type N, cw(c..) or ccw(c..) an arc to the next point about the centre after c; other vN are vias at no path point)
12MHZ: JP2.2 U3.L13 | length 26.6
  TOP w0.114: v1(44.315,29.24) 51.532,29.24 v2(52.832,30.539) 52.805,30.539 v2@52.745,30.6 ; v2(62.745,39) 62.745,39.775 JP2.2@62.77,39.8
  TOP w0.203: U3.L13@43.915,28.84 v1(44.315,29.24)
  BOTTOM w0.114: v2@52.774,30.429 54.332,31.987 54.332,36.259 56.073,38 61.745,38 v2(62.745,39)
+12.0V: C141.1 C155.1 F1.2 R113.2 R151.1 R161.1 U15.9 U15.10 U16.9 U16.10 | length 50.4
  TOP w0.254: v2(14.793,29.618) 14.841,29.569 14.841,29.246 R151.1@15.011,29.077
  TOP w0.508: v2(33.758,15.359) 33.855,15.457 34.216,15.457 R161.1@34.287,15.528
  L04_PWR w0.254: v1(4.276,54.162) 4.448,53.99 4.448,30.47 v2(4.316,30.338) ; 4.316,27.531 11.392,27.531 13.502,29.641 14.77,29.641 v2(14.793,29.618)
  L04_PWR w0.381: v2(4.316,28.814) v2(4.316,29.576) v2(4.316,30.338) ; 32.145,5.4 32.145,14.6 32.904,15.359 v2(33.758,15.359)
  BOTTOM w0.508: v1(4.276,54.162) R113.2@5.442,54.162
  other v2: 33.092,4.394 33.752,4.42 34.438,4.42 2.319,10.736 3.544,10.736 4.713,10.736 9.643,11.379 2.319,12.175 3.544,12.175 4.713,12.175 9.66,12.611 2.319,13.737 3.544,13.737 4.713,13.737 9.598,14.174 2.319,14.905 4.713,14.963 3.544,14.966 5.541,15.395 8.37,15.395 6.798,15.429 6.437,29.629 7.453,29.629
ADBUS0: R5.1 U1.16 | length 2.5
  TOP w0.152: U1.16@61.794,53.817 v2(61.794,55.55)
  TOP w0.254: U1.16@61.776,53.799 U1.16@61.794,53.817
  BOTTOM w0.152: R5.1@61.796,54.862 v2@61.796,55.547
  BOTTOM w0.254: v2(61.794,55.55) v2@61.796,55.547 ; R5.1@61.796,54.862 R5.1@61.799,54.86
ADBUS1: R6.1 U1.17 | length 2.7
  TOP w0.152: U1.17@59.726,55.849 59.754,55.877 59.754,56.566 59.99,56.802 v2(59.99,56.871)
  BOTTOM w0.152: v2(59.99,56.871) 60.553,56.307 R6.1@60.553,55.555
ADBUS2: R7.1 U1.18 | length 2.2
  TOP w0.152: U1.18@59.226,55.849 59.23,55.854 59.23,56.804 v2(59.235,56.809)
  BOTTOM w0.254: R7.1@59.182,55.555 59.235,55.608 v2(59.235,56.809)
ADBUS3: R8.1 U1.19 | length 3.6
  TOP w0.152: U1.19@58.726,55.849 58.702,55.873 58.702,57.139 58.796,57.234 v2(58.796,57.302)
  BOTTOM w0.152: R8.1@57.851,55.555 57.851,56.357 v2(58.796,57.302)
CAM0_0_N: J3.8 R28.2 U3.C1 | length 43.6
  TOP w0.114: J3.8@1.465,49.422 ccw(c1.503,49.46) 1.503,49.406 2.179,49.406 ccw(c2.179,49.447) 2.207,49.418 cw(c2.236,49.39) 2.236,49.43 2.272,49.43 ccw(c2.272,49.588) v1(2.383,49.476) ; v1(33.915,35.64) U3.C1@34.315,35.24
  L06_SIG w0.114: v1(2.383,49.476) 2.614,49.707 4.359,49.707 7.882,46.183 7.999,46.067 8.203,46.067 8.656,46.52 9.166,46.52 9.689,45.997 9.689,45.487 9.236,45.034 9.236,44.829 9.59,44.476 10.797,43.269 27.889,43.269 32.98,38.178 32.98,37.16 32.98,37.103 33.063,37.019 33.519,37.019 33.603,36.935 33.603,36.684 33.519,36.6 33.063,36.6 32.98,36.516 32.98,36.402 32.98,36.086 33.425,35.64 v1(33.915,35.64)
  BOTTOM w0.114: v1(33.915,35.64) 33.915,35.651 34.066,35.802 34.066,36.123 R28.2@33.975,36.214
CAM0_0_P: J3.7 R28.1 U3.B2 | length 43.7
  TOP w0.114: J3.7@1.465,49.022 cw(c1.503,48.984) 1.503,49.038 2.179,49.038 cw(c2.179,48.998) 2.207,49.026 ccw(c2.236,49.055) 2.236,49.014 2.272,49.014 cw(c2.272,48.857) v1(2.383,48.968) ; v1(34.715,35.64) U3.B2@35.115,36.04
  L06_SIG w0.114: v1(2.383,48.968) 2.426,48.968 2.796,49.339 4.206,49.339 7.622,45.923 7.846,45.698 8.356,45.698 8.809,46.151 9.014,46.151 9.321,45.844 9.321,45.639 8.868,45.187 8.868,44.677 9.329,44.215 10.644,42.901 27.736,42.901 32.611,38.025 32.611,35.933 33.273,35.272 34.347,35.272 v1(34.715,35.64)
  BOTTOM w0.114: R28.1@34.525,36.214 34.435,36.123 34.435,35.858 34.652,35.64 v1(34.715,35.64)
CAM0_1_N: J3.11 R29.2 U3.B3 | length 44.1
  TOP w0.114: J3.11@1.465,50.622 ccw(c1.503,50.66) 1.503,50.606 3.195,50.606 ccw(c3.195,50.647) 3.223,50.618 cw(c3.252,50.59) 3.252,50.63 3.288,50.63 ccw(c3.288,50.788) v1(3.399,50.676) ; U3.B3@35.915,36.04 v1(36.315,36.44)
  L06_SIG w0.114: v1(3.399,50.676) 3.405,50.683 3.405,51.025 3.58,51.2 3.848,51.2 4.324,51.2 4.429,51.095 4.429,50.546 4.534,50.441 4.743,50.441 4.848,50.546 4.848,51.095 4.953,51.2 6.362,51.2 7.624,51.2 14.192,44.632 27.83,44.632 35.805,36.656 36.1,36.656 v1(36.315,36.44)
  BOTTOM w0.114: R29.2@35.581,36.551 35.672,36.641 36.114,36.641 v1(36.315,36.44)
CAM0_1_P: J3.10 R29.1 U3.A3 | length 44.1
  TOP w0.114: J3.10@1.465,50.222 cw(c1.503,50.184) 1.503,50.238 3.195,50.238 cw(c3.195,50.198) 3.223,50.226 ccw(c3.252,50.255) 3.252,50.214 3.288,50.214 cw(c3.288,50.057) v1(3.399,50.168) ; U3.A3@35.915,36.84 v1(36.315,37.24)
  L06_SIG w0.114: v1(3.399,50.168) 3.359,50.168 3.012,50.516 3.012,51.153 3.427,51.568 6.362,51.568 7.776,51.568 14.345,45 27.982,45 35.958,37.024 36.1,37.024 v1(36.315,37.24)
  BOTTOM w0.114: R29.1@35.581,37.101 35.672,37.01 36.085,37.01 v1(36.315,37.24)
CAM0_CLK_N: J3.5 R27.2 U3.B1 | length 44.4
  TOP w0.114: J3.5@1.465,48.222 ccw(c1.503,48.26) 1.503,48.206 3.169,48.206 ccw(c3.169,48.247) 3.198,48.218 cw(c3.226,48.19) 3.226,48.23 3.262,48.23 ccw(c3.262,48.388) v1(3.374,48.276) ; v1(31.314,35.941) 31.36,35.987 31.478,35.987 31.501,36.011 31.934,36.011 R27.2@31.999,35.945 32.106,36.052 32.912,36.052 34.303,36.052 U3.B1@34.315,36.04
  L06_SIG w0.114: v1(3.374,48.276) 3.327,48.23 3.21,48.23 3.186,48.206 2.266,48.206 1.576,47.517 1.576,45.649 6.624,40.602 26.943,40.602 27.758,39.787 27.758,37.046 28.792,36.011 31.126,36.011 31.15,35.987 31.267,35.987 v1(31.314,35.941)
CAM0_CLK_P: J3.4 R27.1 U3.A2 | length 44.3
  TOP w0.114: J3.4@1.465,47.822 cw(c1.503,47.784) 1.503,47.838 3.169,47.838 cw(c3.169,47.798) 3.198,47.826 ccw(c3.226,47.855) 3.226,47.814 3.262,47.814 cw(c3.262,47.657) v1(3.374,47.768) ; v1(31.314,36.449) 31.36,36.403 31.478,36.403 31.501,36.379 31.883,36.379 R27.1@31.999,36.495 32.074,36.421 34.696,36.421 U3.A2@35.115,36.84
  L06_SIG w0.114: v1(3.374,47.768) 3.327,47.814 3.21,47.814 3.186,47.838 2.418,47.838 2.284,47.704 1.945,47.364 1.945,46.871 2.049,46.767 2.06,46.767 2.164,46.662 2.164,46.452 2.06,46.348 2.049,46.348 1.945,46.243 1.945,45.802 1.98,45.767 6.776,40.97 27.095,40.97 28.126,39.94 28.126,37.198 28.945,36.379 31.126,36.379 31.15,36.403 31.267,36.403 v1(31.314,36.449)
CAM0_MCLK: J3.19 R34.2 | length 46.2
  TOP w0.114: v1(3.355,48.929) 3.662,48.622 J3.19@4.745,48.622
  L06_SIG w0.114: v1(3.355,48.929) 4.145,48.139 4.145,46.6 8.876,41.869 27.476,41.869 29.192,40.153 29.192,37.553 29.545,37.2 31.322,37.2 31.977,36.545 31.977,35.375 32.745,34.607 32.945,34.407 32.945,32.632 v1(35.518,30.059)
  BOTTOM w0.114: v1(35.518,30.059) 35.545,30.032 R34.2@35.545,29.475
CAM0_SCL: J3.2 R26.2 U3.N5 | length 50.2
  TOP w0.152: J3.2@1.465,47.022 1.477,47.034 3.094,47.034 v1@3.106,47.045
  TOP w0.203: v1(37.117,27.63) U3.N5@37.517,27.229
  L03_SIG w0.114: v1@3.106,47.045 3.138,47.013 13.74,47.013 18.763,41.989 25.519,41.989 27.275,40.234 27.275,31.355 29.245,29.385 32.745,29.385 35.51,29.385 37.071,27.824 37.071,27.676 v1(37.117,27.63)
  BOTTOM w0.152: v1(3.103,47.055) 3.646,47.055 R26.2@3.691,47.01
CAM0_SDA: J3.1 R25.2 U3.N4 | length 49.6
  TOP w0.152: J3.1@1.465,46.622 1.467,46.62 2.314,46.62 2.594,46.339 v1@3.092,46.339
  TOP w0.203: v1(36.444,27.61) 36.474,27.581 36.474,27.535 36.716,27.293 U3.N4@36.716,27.24
  L03_SIG w0.114: v1@3.092,46.339 3.34,46.587 13.358,46.587 18.644,41.3 25.395,41.3 26.708,39.988 26.708,31.174 28.868,29.014 32.745,29.014 35.517,29.014 36.444,28.087 v1(36.444,27.61)
  BOTTOM w0.152: v1(3.078,46.317) 3.541,46.317 R25.2@3.68,46.178
CAM1_0_N: J4.8 R30.2 U3.U11 | length 46.6
  TOP w0.114: U3.U11@42.337,24.028 v1(42.737,23.628) ; v1(67.855,3.073) cw(c67.744,2.962) 67.901,2.962 67.901,2.926 ccw(c67.942,2.926) 67.913,2.898 cw(c67.884,2.869) 67.925,2.869 67.925,2.222 cw(c67.871,2.222) J4.8@67.909,2.184
  L06_SIG w0.114: v1(42.737,23.628) ccw(c42.737,23.368) 42.477,23.368 42.477,21.562 45.271,18.768 57.478,18.768 61.794,14.453 61.91,14.336 62.029,14.336 62.377,14.684 62.801,14.684 63.194,14.291 63.194,13.867 62.569,13.242 62.569,13.123 62.747,12.945 62.865,12.945 63.445,13.525 63.869,13.525 64.262,13.132 64.262,12.708 63.96,12.405 63.96,12.287 64.929,11.317 65.056,11.19 65.056,3.024 65.693,2.388 65.695,2.388 66.619,2.388 66.702,2.472 66.697,2.999 66.781,3.084 67.032,3.086 67.117,3.003 67.121,2.471 67.206,2.388 67.327,2.388 67.679,2.74 67.809,2.869 67.809,3.027 v1(67.855,3.073)
CAM1_0_P: J4.7 R30.1 U3.V11 | length 46.7
  TOP w0.114: v1(41.912,23.641) U3.V11@42.312,23.241 ; J4.7@68.309,2.184 cw(c68.347,2.222) 68.293,2.222 68.293,2.869 cw(c68.334,2.869) 68.305,2.898 ccw(c68.276,2.926) 68.317,2.926 68.317,2.962 cw(c68.474,2.962) v1(68.363,3.073)
  L06_SIG w0.114: v1(41.912,23.641) cw(c41.912,23.444) 42.109,23.444 42.109,21.41 45.118,18.4 57.325,18.4 61.533,14.192 61.758,13.968 62.181,13.968 62.53,14.316 62.648,14.316 62.826,14.138 62.826,14.02 62.201,13.394 62.201,12.97 62.594,12.577 63.018,12.577 63.598,13.157 63.716,13.157 63.894,12.979 63.894,12.86 63.591,12.558 63.591,12.134 64.668,11.057 64.688,11.037 64.688,2.871 65.54,2.019 67.48,2.019 68.317,2.857 68.317,3.027 v1@68.358,3.069
CAM1_1_N: J4.11 R31.2 U3.V12 | length 46.8
  TOP w0.114: U3.V12@43.115,23.24 43.129,23.24 43.553,22.817 v1(43.567,22.817) ; v1(66.645,4.115) 66.709,4.115 J4.11@66.709,2.184
  L06_SIG w0.114: v1(43.567,22.817) 43.543,22.841 43.505,22.841 43.505,22.783 43.636,22.653 43.636,21.175 45.48,19.331 59.405,19.331 60.466,18.27 60.69,18.045 61.114,18.045 61.576,18.507 61.695,18.507 61.873,18.33 61.873,18.211 61.315,17.653 61.315,17.23 61.709,16.836 62.132,16.836 62.69,17.394 62.809,17.394 62.986,17.216 62.986,17.097 62.429,16.54 62.429,16.116 62.822,15.723 63.246,15.723 63.804,16.28 63.922,16.28 64.1,16.102 64.1,15.984 63.542,15.426 63.542,15.003 63.936,14.609 64.359,14.609 64.865,15.115 64.984,15.115 65.162,14.937 65.162,14.819 64.751,14.408 64.751,13.984 65.5,13.235 65.629,13.107 65.629,8.674 66.715,7.588 66.715,4.302 66.691,4.279 66.691,4.161 v1(66.645,4.115)
  BOTTOM w0.114: R31.2@43.519,22.409 43.567,22.456 v1(43.567,22.817)
CAM1_1_P: J4.10 R31.1 U3.W13 | length 47
  TOP w0.114: U3.W13@43.915,22.44 43.915,22.493 44.196,22.774 v1(44.196,22.789) ; J4.10@67.109,2.184 67.109,4.115 v1(67.153,4.115)
  L06_SIG w0.114: v1@44.135,22.813 v1@44.135,22.756 ; v1(44.196,22.789) 44.168,22.789 v1@44.135,22.756 ; v1(67.153,4.115) 67.107,4.161 67.107,4.279 67.083,4.302 67.083,7.741 65.997,8.827 65.997,8.981 65.997,9.457 66.081,9.541 66.229,9.541 66.313,9.625 66.313,9.876 66.229,9.96 66.081,9.96 65.997,10.044 65.997,10.295 66.081,10.379 66.218,10.379 66.302,10.463 66.302,10.715 66.218,10.798 66.081,10.798 65.997,10.882 65.997,11.336 65.997,13.259 65.76,13.496 65.119,14.137 65.119,14.255 65.53,14.666 65.53,15.09 65.136,15.483 64.713,15.483 64.207,14.977 64.088,14.977 63.911,15.155 63.911,15.274 64.468,15.831 64.468,16.255 64.075,16.649 63.651,16.649 63.093,16.091 62.975,16.091 62.797,16.269 62.797,16.387 63.355,16.945 63.355,17.369 62.961,17.762 62.537,17.762 61.98,17.204 61.861,17.204 61.683,17.382 61.683,17.501 62.241,18.058 62.241,18.482 61.848,18.876 61.424,18.876 60.962,18.413 60.843,18.413 60.726,18.53 59.557,19.699 45.633,19.699 44.004,21.327 44.004,22.626 v1@44.135,22.756
CAM1_CLK_N: J4.5 R38.2 U3.Y11 | length 47.3
  TOP w0.114: U3.Y11@42.315,21.64 42.315,21.28 42.315,21.215 42.42,21.11 42.783,21.11 42.888,21.005 42.888,20.796 42.783,20.691 42.42,20.691 42.315,20.586 42.315,20.11 42.315,19.652 R38.2@42.409,19.558 42.388,19.537 v1(42.388,19.129) ; v1(69.004,3.581) 69.004,3.516 69.102,3.418 69.102,3.299 69.09,3.287 69.09,2.203 J4.5@69.109,2.184
  L06_SIG w0.114: v1(42.388,19.129) 42.571,18.946 42.611,18.906 42.759,18.906 43.161,19.308 43.31,19.308 43.458,19.16 43.458,19.012 43.056,18.61 43.056,18.461 43.419,18.098 44.13,18.098 44.229,18.098 44.699,17.628 56.383,17.628 63.914,10.096 63.914,2.273 65.019,1.168 68.913,1.168 69.161,1.417 69.161,3.359 69.004,3.516 v1(69.004,3.581)
CAM1_CLK_P: J4.4 R38.1 U3.W11 | length 47.4
  TOP w0.114: v1(41.88,19.129) 41.88,19.537 R38.1@41.859,19.558 41.947,19.646 41.947,21.994 42.315,22.363 U3.W11@42.315,22.44 ; J4.4@69.509,2.184 69.509,2.536 69.458,2.587 69.458,3.134 69.47,3.147 69.47,3.372 69.614,3.516 v1(69.614,3.581)
  L06_SIG w0.114: v1(41.88,19.129) 41.88,19.064 43.214,17.729 44.077,17.729 44.547,17.259 56.231,17.259 63.546,9.944 63.546,2.121 64.867,0.8 69.066,0.8 69.53,1.264 69.53,3.432 69.614,3.516 v1(69.614,3.581)
CAM1_MCLK: J4.19 R35.2 | length 53.2
  TOP w0.114: J4.19@68.709,5.464 68.731,5.442 68.731,4.721 v1(68.753,4.699)
  L06_SIG w0.114: v1(35.515,27.64) cw(c35.512,27.526) 35.592,27.607 36.601,26.598 36.73,26.469 41.243,26.469 41.618,26.093 41.618,24.786 42.307,24.124 44.09,24.124 cw(c44.09,24.01) 44.17,24.091 44.623,23.638 ; 44.623,23.638 cw(c44.542,23.557) 44.656,23.557 44.656,21.534 ccw(c44.77,21.534) 44.689,21.454 45.634,20.509 50.945,20.509 63.052,20.509 64.461,19.101 66.188,19.101 68.753,16.535 v1(68.753,4.699)
  BOTTOM w0.114: v1(35.515,27.64) 35.515,27.656 R35.2@36.074,28.215
CAM1_SCL: J4.2 R33.2 U3.P6 | length 55.1
  TOP w0.114: J4.2@70.309,2.184 70.309,2.867 71.392,3.95 v1(72.62,3.95)
  TOP w0.203: v1(37.915,26.04) U3.P6@38.316,26.44
  L03_SIG w0.114: v1(37.915,26.04) 37.49,25.615 37.49,22.906 38.582,21.815 41.122,21.815 42.937,20 44.395,18.542 50.848,18.542 54.004,15.386 54.004,9.593 61.01,2.587 71.256,2.587 v1(72.62,3.95)
  BOTTOM w0.152: v1(72.62,3.95) R33.2@72.945,3.95
CAM1_SDA: J4.1 R32.2 U3.P5 | length 57.6
  TOP w0.114: J4.1@70.709,2.184 70.709,2.81 71.396,3.497 73.405,3.497 73.44,3.461 73.557,3.461 v1(73.596,3.422)
  TOP w0.203: v1(37.115,26.04) U3.P5@37.515,26.44
  L03_SIG w0.114: v1(37.115,26.04) 37.115,25.975 36.995,25.854 36.995,22.64 38.181,21.453 40.612,21.453 42.065,20 44.135,17.93 50.58,17.93 53.285,15.225 53.285,9.398 60.651,2.032 72.206,2.032 v1(73.596,3.422)
  BOTTOM w0.152: v1(73.596,3.422) 73.604,3.43 73.604,3.695 R32.2@73.852,3.944
CAM2_0_N: J5.8 R39.2 U3.B7 | length 29.4
  TOP w0.114: v1(38.63,37.937) 38.674,37.893 38.674,36.989 38.674,36.514 39.115,36.073 U3.B7@39.115,36.04 ; J5.8@42.185,57.541 ccw(c42.223,57.503) 42.169,57.503 42.169,56.846 ccw(c42.21,56.846) 42.181,56.818 cw(c42.152,56.789) 42.193,56.789 42.193,56.753 ccw(c42.35,56.753) v1(42.239,56.642) cw(c42.101,56.642) v1@42.199,56.544
  L06_SIG w0.114: v1(38.63,37.937) 38.63,38.003 38.718,38.091 38.718,38.118 39,38.4 40.313,39.713 41.337,39.713 42.345,40.721 42.345,41.879 41.836,42.388 41.836,42.396 41.836,43.11 41.731,43.214 41.052,43.214 40.732,43.534 40.732,44.151 41.052,44.471 42.147,44.471 42.251,44.575 42.251,44.888 42.147,44.992 40.944,44.992 40.624,45.312 40.624,45.929 40.944,46.249 41.731,46.249 41.836,46.353 41.836,47.407 41.836,53.747 41.836,53.804 41.73,53.908 41.51,53.906 41.404,54.01 41.403,54.22 41.507,54.325 41.732,54.327 41.836,54.432 41.836,55.127 41.836,56.199 42.239,56.602 v1(42.239,56.642)
CAM2_0_P: J5.7 R39.1 U3.A7 | length 29.4
  TOP w0.114: U3.A7@39.115,36.84 39.115,37.815 39.183,37.882 v3(39.183,37.948) ; J5.7@41.785,57.541 cw(c41.747,57.503) 41.801,57.503 41.801,56.846 cw(c41.76,56.846) 41.789,56.818 ccw(c41.818,56.789) 41.777,56.789 41.777,56.753 cw(c41.62,56.753) v1(41.731,56.642) 41.739,56.642 ccw(c41.739,56.729) v1@41.801,56.667
  L06_SIG w0.114: v3@39.087,37.966 39.521,38.4 40.466,39.345 41.489,39.345 42.713,40.568 42.713,42.032 42.204,42.541 42.204,43.262 41.884,43.582 41.204,43.582 41.1,43.686 41.1,43.999 41.204,44.103 42.3,44.103 42.62,44.423 42.62,45.04 42.3,45.36 41.096,45.36 40.992,45.464 40.992,45.777 41.096,45.881 41.884,45.881 42.204,46.201 42.204,55.859 42.626,56.282 42.626,56.918 42.392,57.153 41.897,57.153 41.731,56.986 v1(41.731,56.642)